# Altium PCB LCD_Disp.PcbDoc
Units mm, origin at the board's own origin, x right, y up, seen from the top; angles counter-clockwise.
Board outline 50 x 34 mm, 4 copper layers (TOP, GND, PWR, BTM), stack 1.618 mm thick; 17 components, 9 nets, 50 pads, 15 vias.
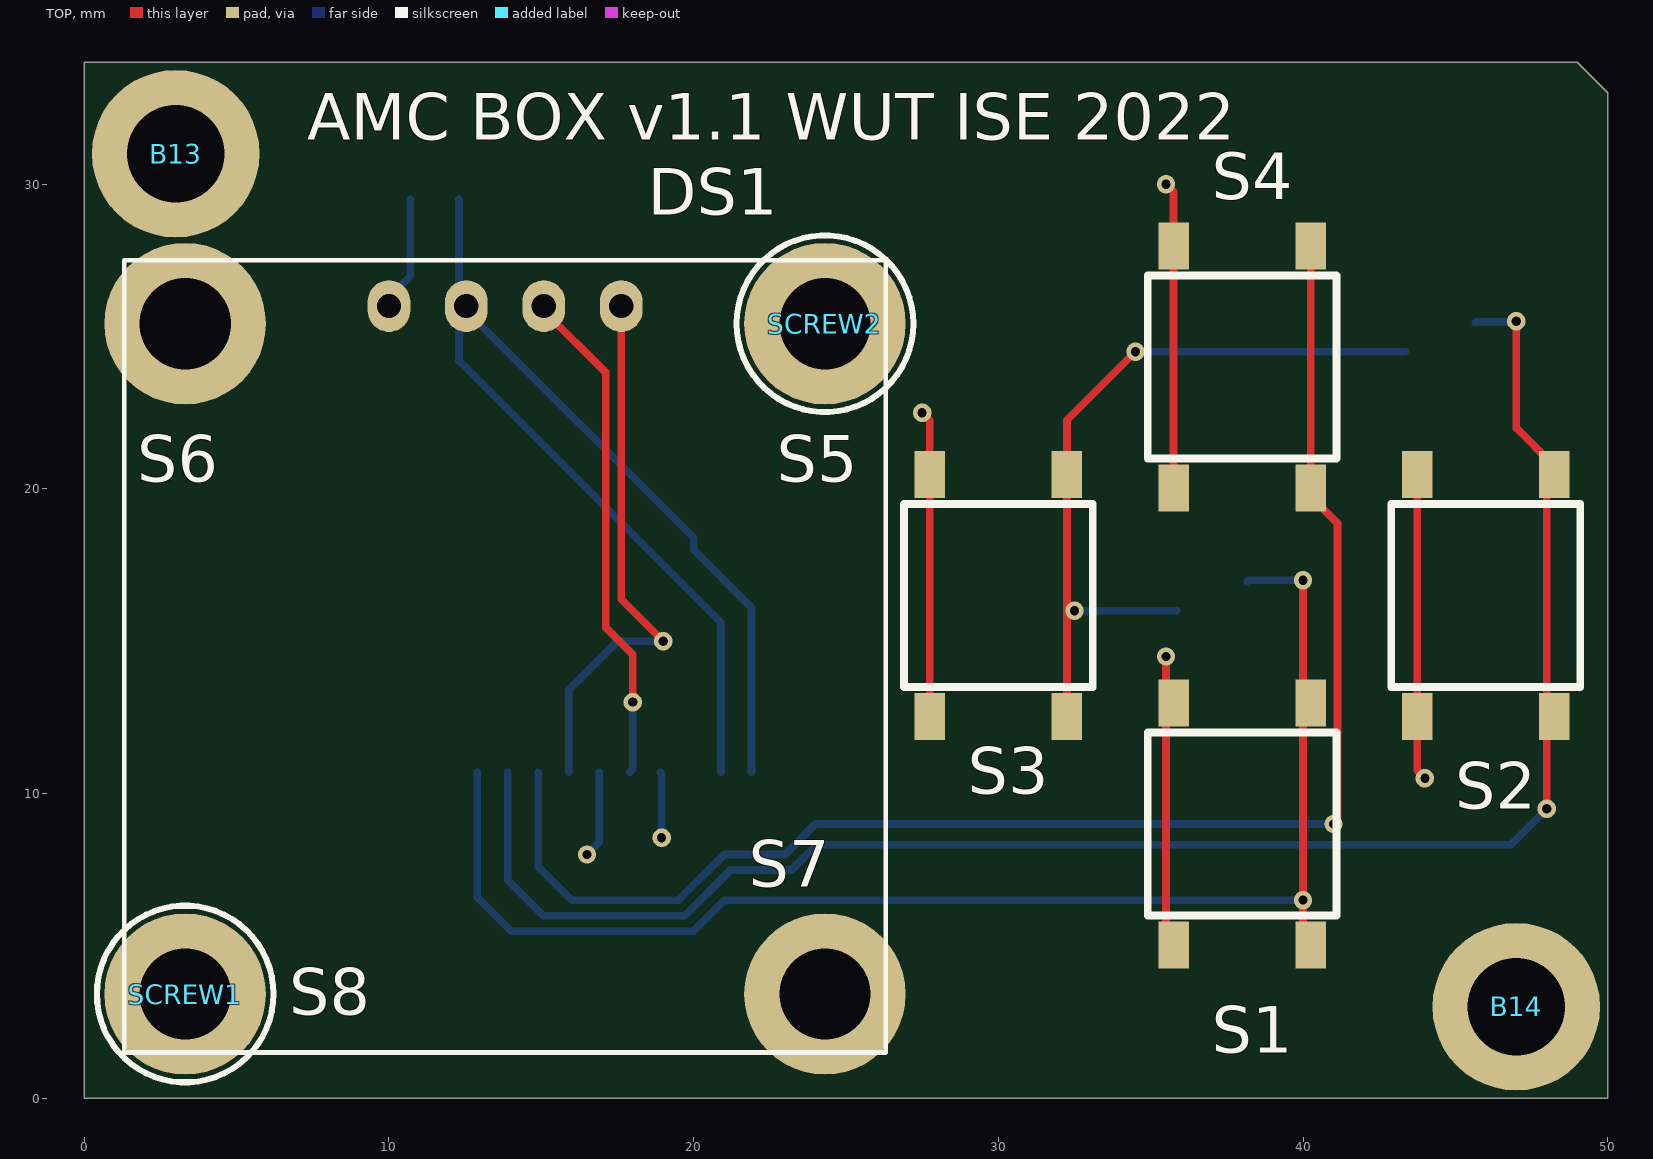
[diagram p0: TOP view]
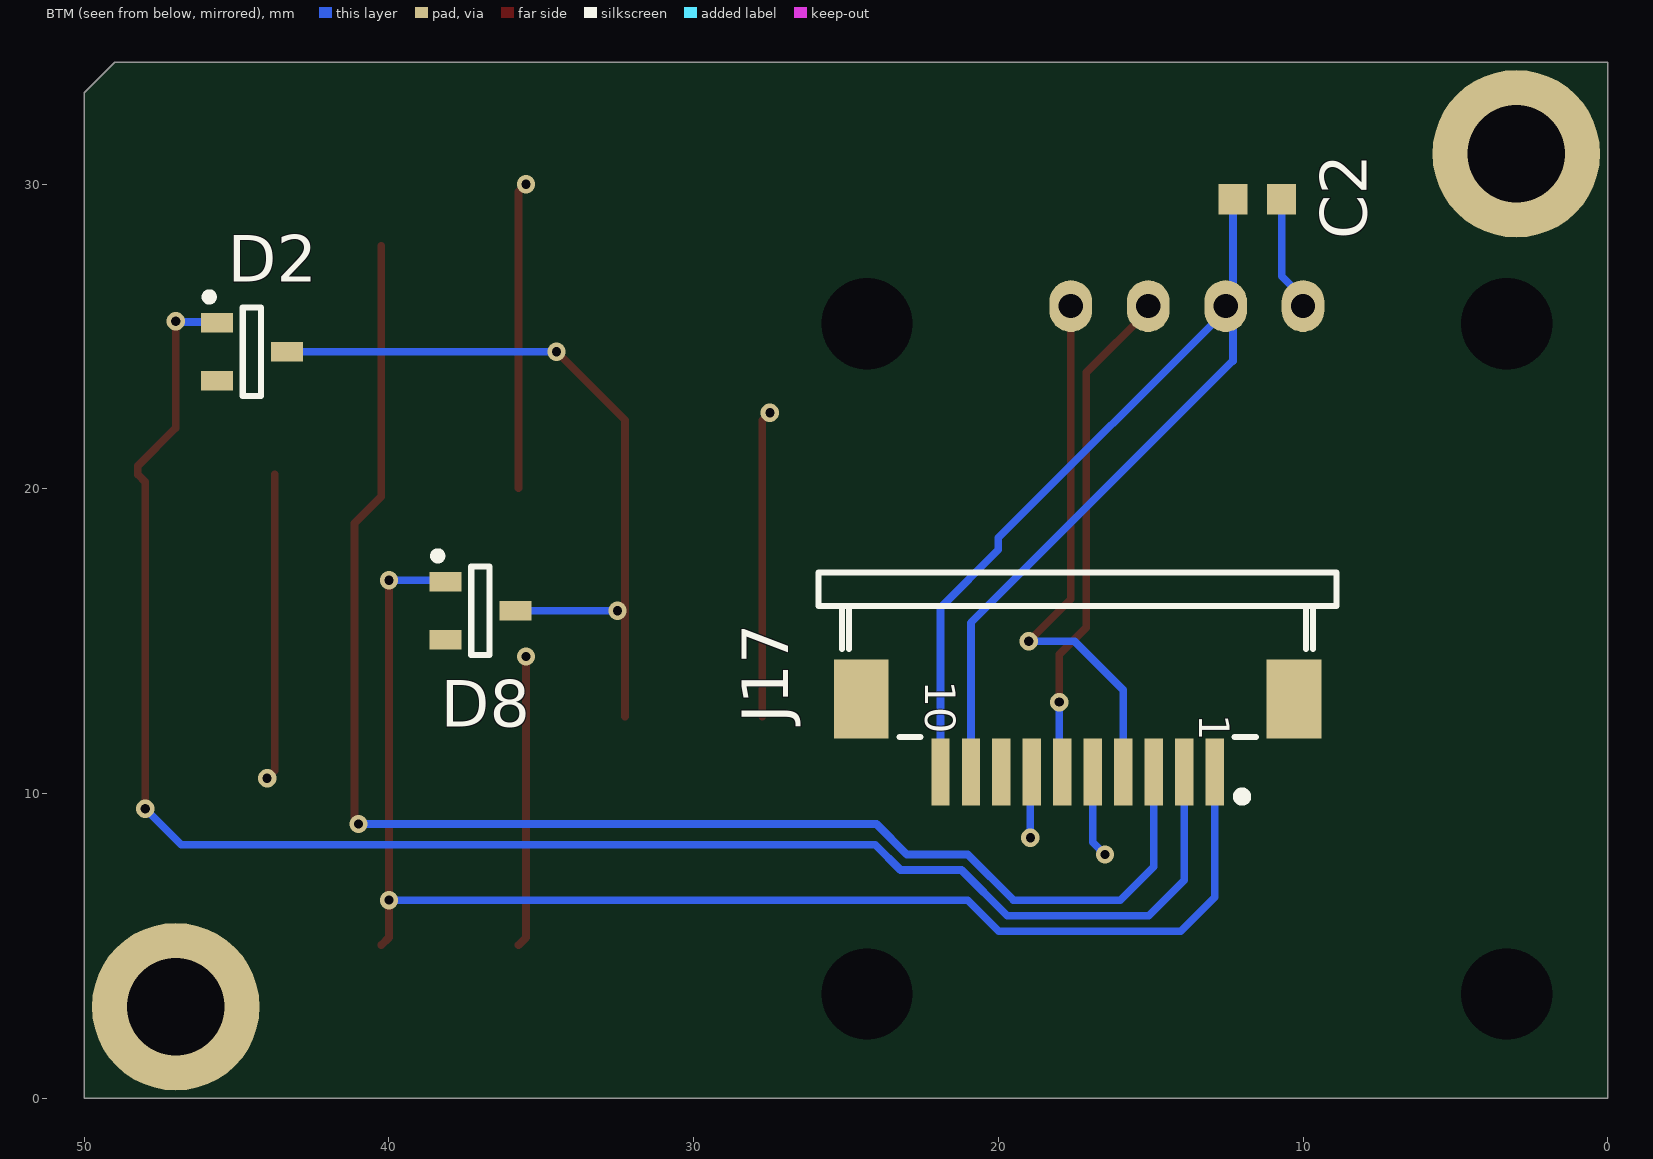
[diagram p1: BTM view, seen from below]
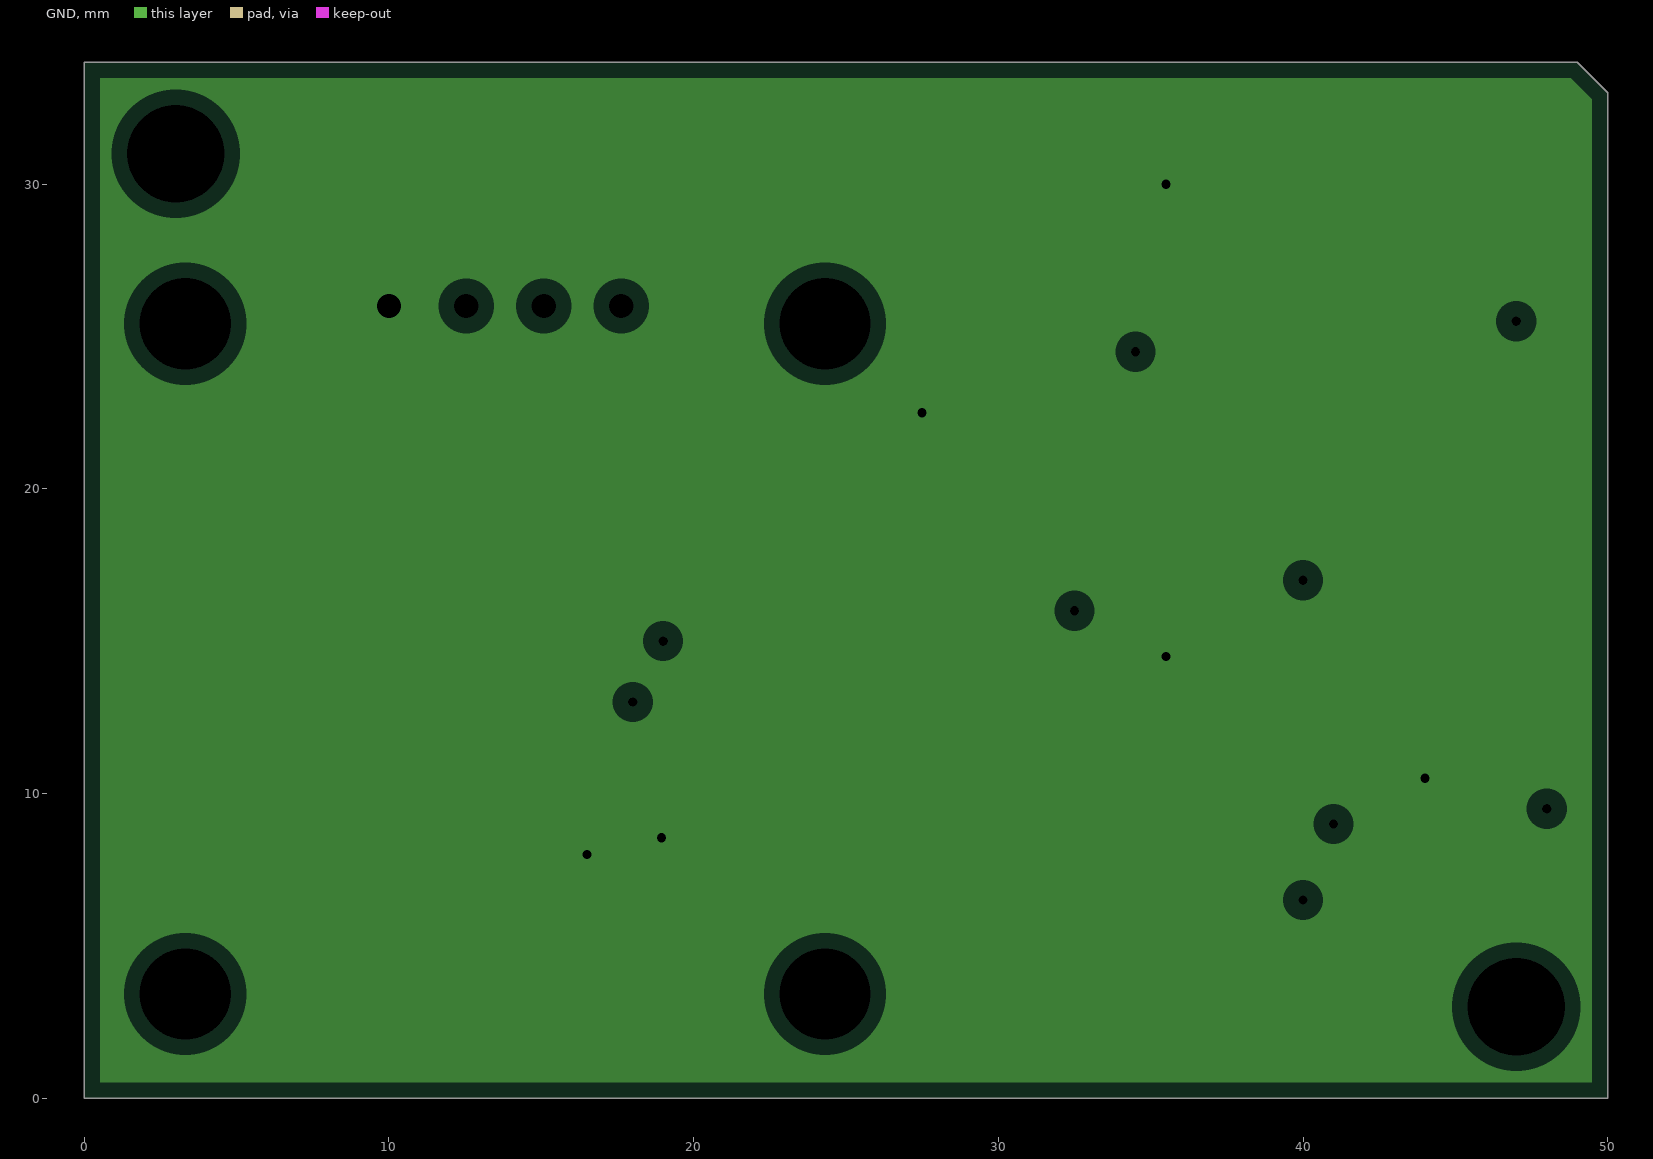
[diagram p2: GND, clearances drawn from the general rule]
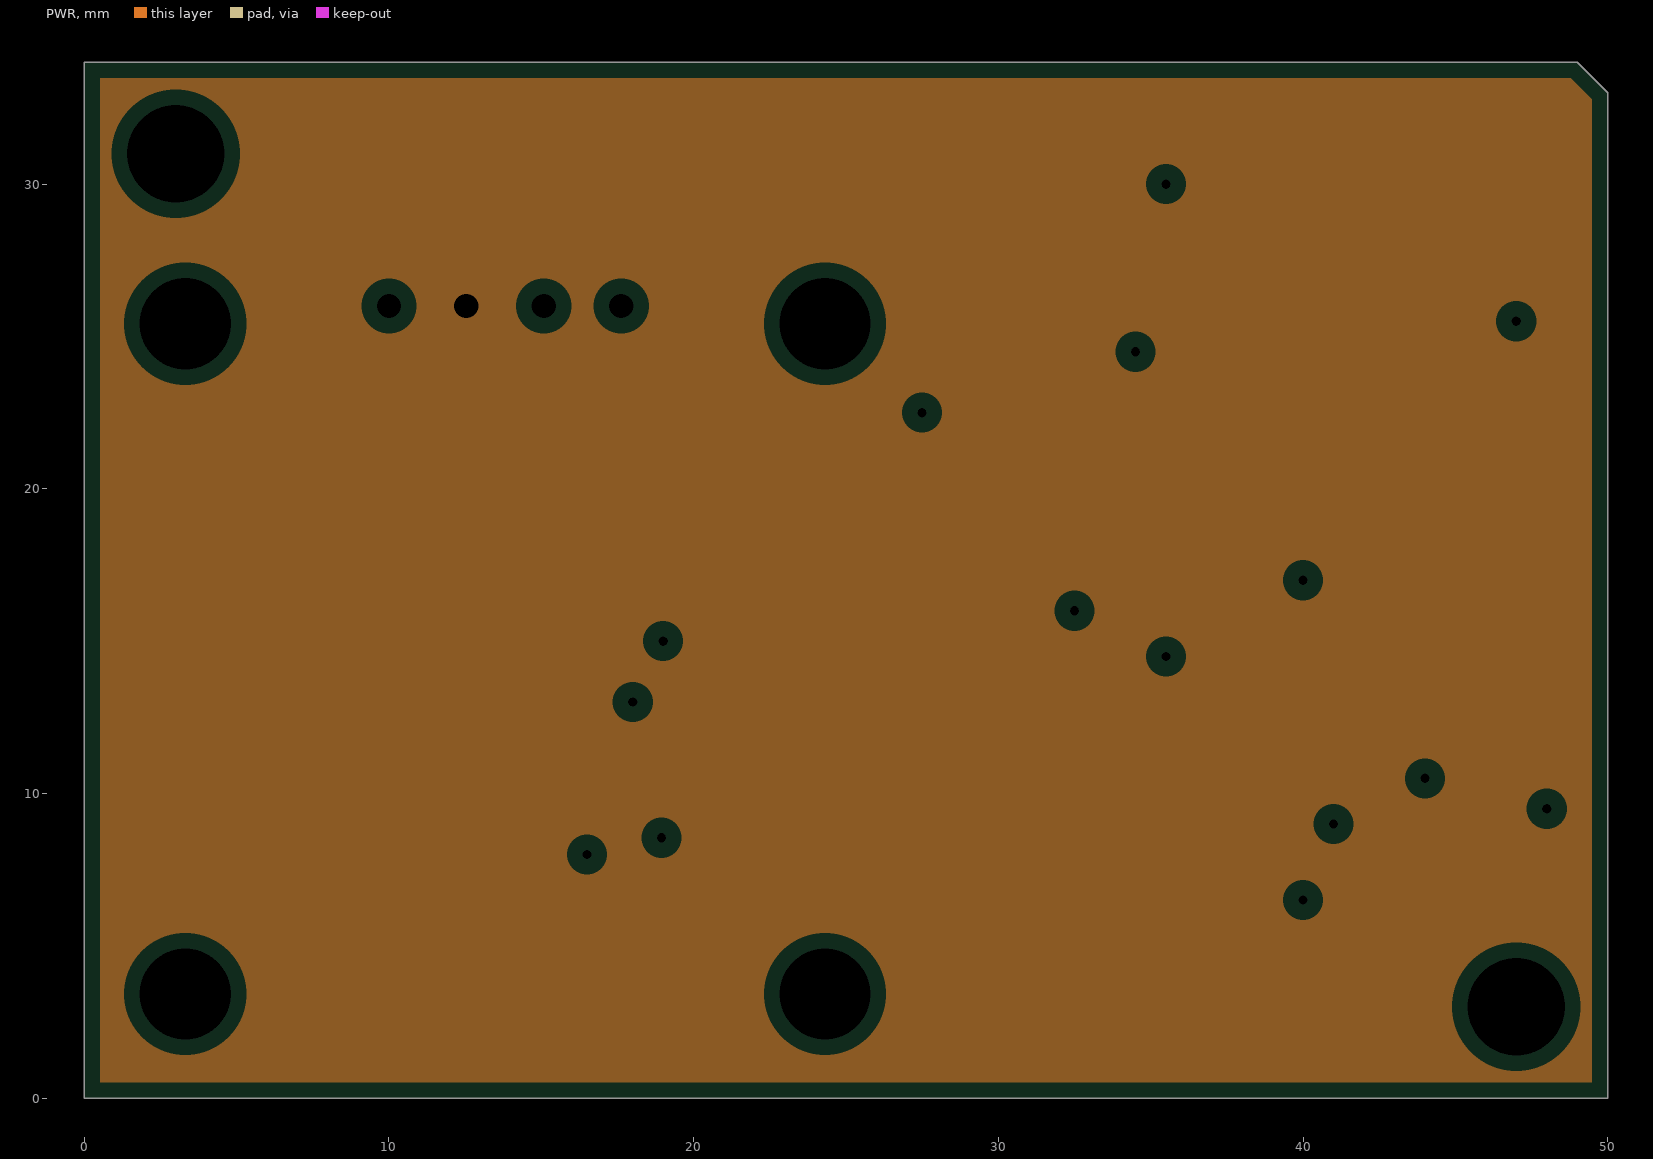
[diagram p3: PWR, clearances drawn from the general rule]
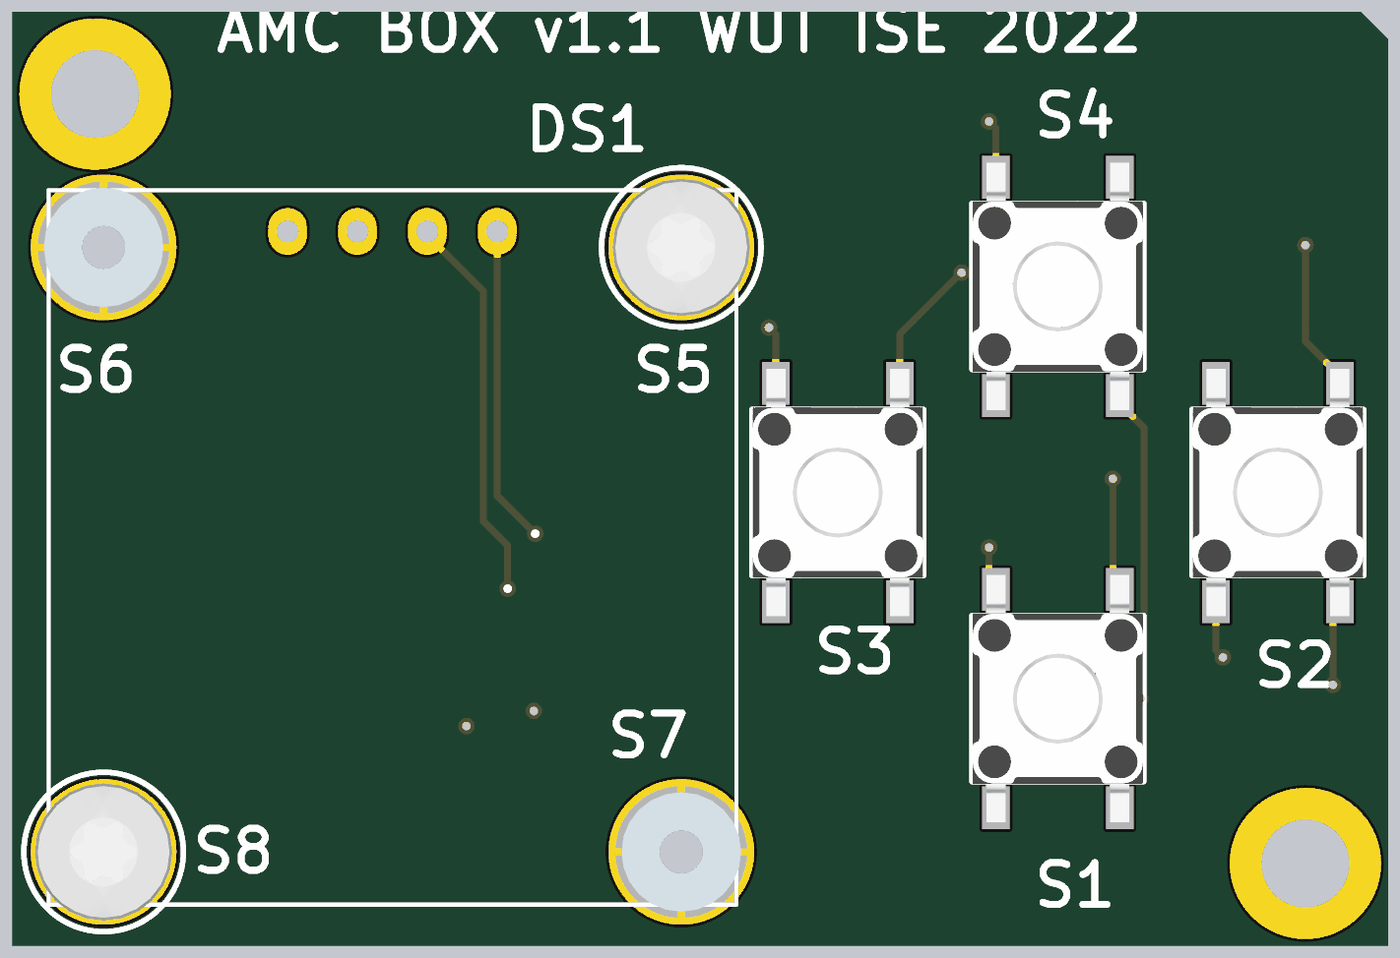
[diagram p4: 3D render of the assembled board from above, using the file's embedded part models]
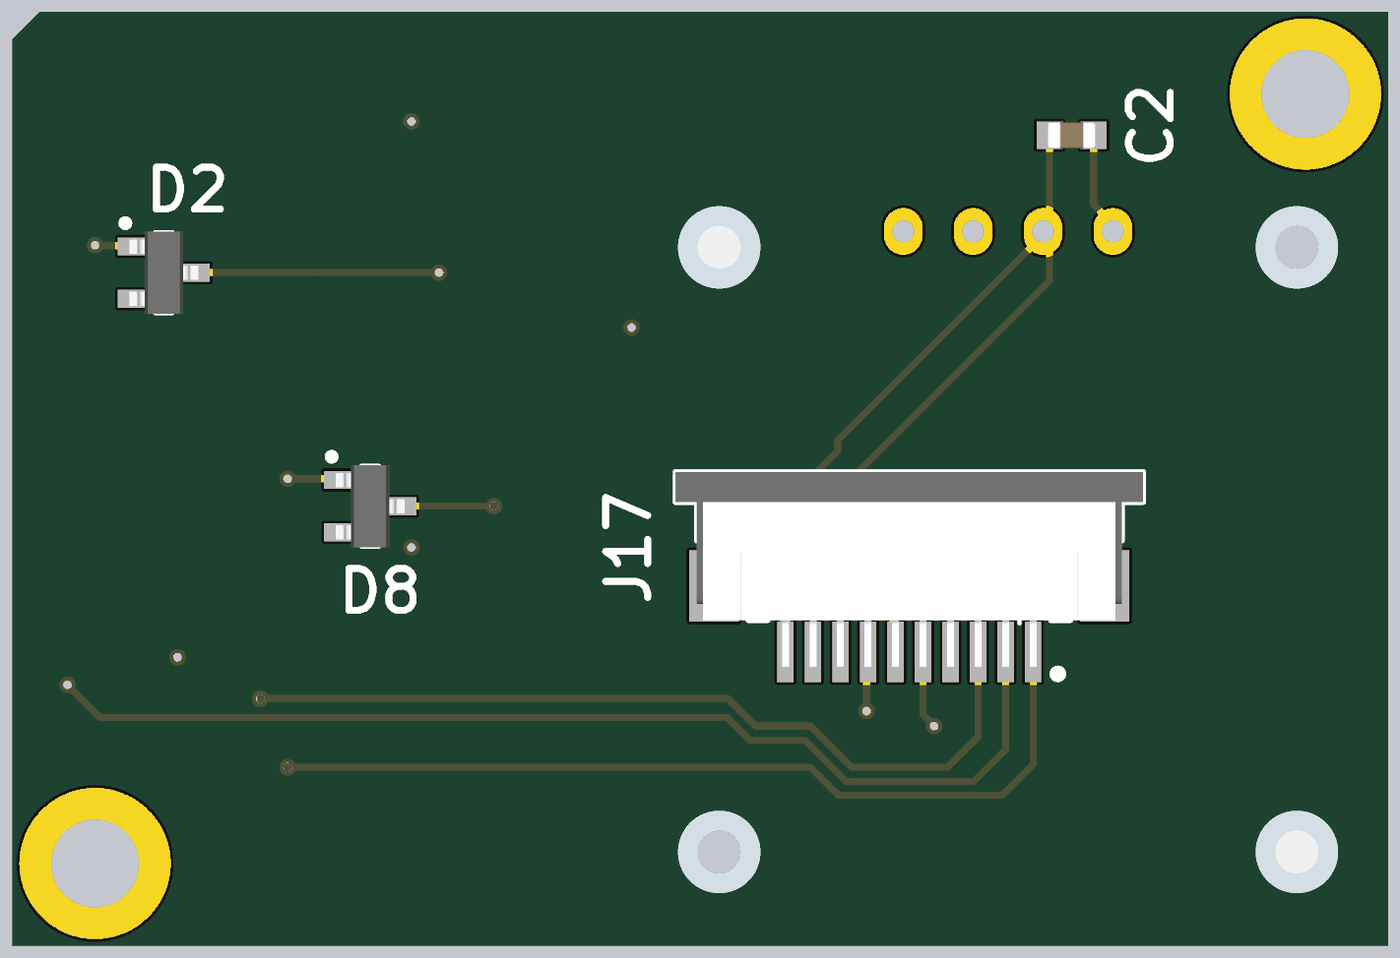
[diagram p5: 3D render of the assembled board from below, using the file's embedded part models]

## Layer stack, top to bottom
Top Solder: solder mask 0.012, Solder Resist, Dk 3.5
TOP: signal copper 0.053
Dielectric1: core 0.18, FR4 IT180-A / S1000-2 0.135mm 18u/18u, Dk 4.5
GND: plane copper 0.036, net GND
Dielectric2: prepreg 1.08, FR-4, Dk 4.5
PWR: plane copper 0.036, net P3V3
Dielectric3: core 0.18, FR4 IT180-A / S1000-2 0.135mm 18u/18u, Dk 4.5
BTM: signal copper 0.053
Bottom Solder: solder mask 0.012, Solder Resist, Dk 3.5

## Board outline
0,0 50,0 50,33 49,34 0,34

## Design rules (kind name [scope] priority, off if disabled: settings)
Clearance [All] p1: gap=0.15 ignorepadtopadclearanceinfootprint=FALSE
HoleSize [All] p1: absolutevalues=TRUE maxlimit=4 minlimit=0.2 maxpercent=80.000 minpercent=20.000
MinimumSolderMaskSliver [All] p1: minsoldermaskwidth=0.05
PlaneClearance [All] p1: clearance=0.508
PlaneConnect [All] p1: planeconnectstyle=Relief reliefexpansion=0.508 reliefentries=4 reliefconductorwidth=0.254 reliefairgap=0.254
PolygonConnect [All] p1: connectstyle=Relief reliefconductorwidth=0.254 reliefentries=4 polygonreliefangle="90 Angle" airgapwidth=0.254
RoomDefinition LCD_DIsp [InComponentClass('LCD_DIsp')] p1 off: confinementstyle=ConfineIn formatcopy=TRUE lockcomponents=FALSE outline 4,0 37,0 37,7 4,7
RoutingVias [All] p1: holewidth=0.711 width=1.27 viastyle="Through Hole" minholewidth=0.711 minwidth=1.27 maxholewidth=0.711 maxwidth=1.27 useviatemplates=TRUE viatemplateguid#1={927FE58B-87CC-4F0B-9204-EF5B2F46FF37} viatemplatename#1=v60h30m0mx0
SilkToSilkClearance [All] p1: silktosilkclearance=0.05
SilkToSolderMaskClearance [IsPad] p1: minsilkscreentomaskgap=0.05 clearancetoexposedcopper=TRUE
SolderMaskExpansion [All] p1: expansion=0.102 istentingtop=FALSE
Width [All] p1: maxlimit=0.254 minlimit=0.254 preferedwidth=0.254
24 further rules are at their usual default settings.

## Components (designator, comment, footprint, x,y, rotation, side; value= is the part's Value field where it differs from the comment)
B13 "Plated Hole" MTG320_550 3,31 r0 top locked
B14 "Plated Hole" MTG320_550 47,3 r0 top locked
C2 "1uF" CAPC1608X87N 11.5,29.5 r0 bottom
D2 "BAT54" SOT95P240X130-3N 44.5,24.5 r180 bottom
D8 "BAT54" SOT95P240X130-3N 37,16 r180 bottom
DS1 "OSSD-128x64" OSSD-128X64 13.81,26 r0 top locked
J17 "FFC" "WURTH_686 110 144 22" 17.4,10.7 r0 bottom
S1 "430152095826" 4301X20958X6_6X6X9.5 38,9 r90 top
S2 "430152095826" 4301X20958X6_6X6X9.5 46,16.5 r90 top
S3 "430152095826" 4301X20958X6_6X6X9.5 30,16.5 r90 top
S4 "430152095826" 4301X20958X6_6X6X9.5 38,24 r90 top
S5 "9774015243" 9774015243 24.31,25.42 r0 top
S6 "9774015243" 9774015243 3.31,25.42 r0 top
S7 "9774015243" 9774015243 24.31,3.42 r0 top
S8 "9774015243" 9774015243 3.31,3.42 r0 top
SCREW1 "M2.5x4" BOSSARD_BN5687-3061587_v 3.31,3.42 r90 top
SCREW2 "M2.5x4" BOSSARD_BN5687-3061587_v 24.31,25.42 r90 top

## Footprints (in the part's own frame and the unit in brackets; to place one, negate y for a bottom-side part, rotate by r counter-clockwise, add the part's x,y. Pads: shape width x height; smd on the part's side, far side on the other; paste and mask are expansions set on the pad)
4301X20958X6_6X6X9.5 [mm] "6x6mm Tact Switch, SMD version"
  rect 1.55x1 smd: 1(-3.975,2.25) 2(-3.975,-2.25) 3(3.975,2.25) 4(3.975,-2.25)
  silkscreen extent -3,-3.1 3,3.1, body extent -4.5,-3.1 4.5,3.1, height 9.53
9774015243 [mm] "SMD Steel Spacer with internal Thread"
  round 5.3 smd paste-576.133: 1(0,0)
  round 0 hole 3 unplated: ""(0,0)
  body extent -2.17,-2.17 2.16,2.17, height 1.5
BOSSARD_BN5687-3061587_v [mm] "M2.5 L=4mm Hexalobular Socket Pan Head Screw, Fully Threaded - Stainless Steel A2"
  silkscreen extent -2.9,-2.9 2.9,2.9, body extent -2.5,-2.5 2.5,2.5, height 5.1
CAPC1608X87N [mm] "Chip Capacitor, Body 1.6x0.8mm IPC Medium Density"
  rect 0.95x1 smd: 1(-0.8,0) 2(0.8,0)
  body extent -0.87,-0.47 0.88,0.48, height 0.87
MTG320_550 [mm] "Plated Through Hole: Hole Dia.=3.2mm Pad Dia.=5.5mm"
  round 5.5 hole 3.2: 1(0,0)
OSSD-128X64 [mm]
  oval 1.4x1.7 hole 0.8: 1(-3.81,0) 2(-1.27,0) 3(1.27,0) 4(3.81,0)
  silkscreen extent -12.5,-24.5 12.5,1.5, body extent -12.5,-24.5 12.5,1.5, height 5.4
SOT95P240X130-3N [mm] "SOT23 3-Leads, Pitch 0.95mm - Body 1.3x2.9mm, IPC Medium Density"
  rect 1.05x0.65 smd: 1(-1.15,0.95) 2(-1.15,-0.95) 3(1.15,0)
  silkscreen extent -1.53,-1.45 0.3,1.92, body extent -1.25,-1.5 1.25,1.5, height 1.3
"WURTH_686 110 144 22" [mm] "10 Contacts, Pitch 1mm, SMT Connector, ZIF Horizontal Bottom Contact WR-FPC"
  rect 0.6x2.2 smd: 1(-4.5,0) 2(-3.5,0) 3(-2.5,0) 4(-1.5,0) 5(-0.5,0) 6(0.5,0) 7(1.5,0) 8(2.5,0) 9(3.5,0) 10(4.5,0)
  rect 1.8x2.6 smd: P1(-7.1,-2.4) P2(7.1,-2.4)
  silkscreen extent -8.5,-6.55 8.5,0.95, body extent -8.5,-6.55 8.5,0.55, height 3

## Part data
B13 B14: library part PLATED_HOLE3.2_PAD5.5, "Single Terminal Socket", Author="CERN DEM JMW", Component Type="Standard (No BOM)", ComponentHeight=0mm, CreateDate=01.10.2012, Family="Plated Hole", HelpURL=Undefined, LatestRevisionDate=01.10.2012, Mounted=No, PackageDescription="Plated Through Hole: Hole Dia.=3.2mm Pad Dia.=5.5mm", Part Description="Plated Through Hole: Hole Dia.=3.2mm Pad Dia.=5.5mm", Part Number=PLATED_HOLE3.2_PAD5.5, Pin Count=1, Sense=No, SMD=No, Socket=No, Status=None
C2: library part CC0603_1UF_16V_10%_X7R, "Non-polarised capacitor", Case=0603, Manufacturer=GENERIC, Manufacturer1 ComponentHeight=0.9mm, Manufacturer1 Example="YAGEO PHYCOMP", Manufacturer1 Part Number=223878615663, Manufacturer Part Number=CC0603_1uF_16V_10%_X7R, Tolerance=±10%, Voltage=16V, Author="CERN DEM JLC", Component Type=Standard, CreateDate=03.12.2007, HelpURL=\\cern.ch\dfs\Applications\Altium\Datasheets\CC0603_X7R_PHYCOMP.pdf, LatestRevisionDate=17.04.2015, Mounted=Yes, Part Description="SMD Multilayer Chip Ceramic Capacitor", Part Number=CC0603_1UF_16V_10%_X7R, Pin Count=2, Sense=No, SMD=Yes, Socket=No, Status=None, TC=X7R
D2 D8: "Diode Schottky  Anode Pin 1 Cathode Pin 3 (Pas de pin 2)", Case=SOT23-3, Manufacturer="FAIRCHILD SEMICONDUCTOR", Power=200mA, Voltage=30V, Author="CERN DEM JLC", Component Type=Standard, ComponentHeight=1.30mm, CreateDate=2009-09-17, Device=BAT54, HelpURL=\\cern.ch\dfs\Applications\Altium\Datasheets\BAT54.pdf, LatestRevisionDate=2010-05-27, Manufacturer Part Number=BAT54, Mounted=Yes, PackageDescription="SOT23 3-Leads, Pitch 0.95mm - Body 1.3x2.9mm, IPC Medium Density", Part Description="Single Small Signal Schottky Diode", Part Number=BAT54, Pin Count=3, SMD=Yes, Socket=No, Table=Diodes
DS1: library part OLED_OSSD-128x64, "128x64 0.96\" OLED display", Color=Blue, Manufacturer=Generic, Author=GK, Bonding=No, Component Type=Standard, ComponentHeight=2.8mm, CreateDate=24.08.2011, Device=OSSD-128x64, HelpURL=\\cern.ch\dfs\Applications\Altium\Datasheets\DS_EA_DOGXL160B-7.pdf, LatestRevisionDate=27.04.2011, Manufacturer Part Number=OSSD-128x64, Mounted=Yes, PackageDescription="128x64 1.3\" OLED display", Part Description="128x64 1.3\" OLED display", Part Number=OSSD-128x64, Pin Count=4, PressFit=No, Sense=No, SMD=No, Socket=No
J17: library part "WURTH_686 110 144 22", "Connector 10 Female", Manufacturer="WURTH ELEKTRONIK", Manufacturer Part Number="686 110 144 22", Author="CERN DEM JMW", Component Type=Standard, ComponentHeight=3.15mm, CreateDate=06.08.2015, Family=FFC, HelpURL="\\cern.ch\dfs\Applications\Altium\Datasheets\WURTH_686 110 144 22.pdf", LatestRevisionDate=06.08.2015, Mounted=Yes, Part Description="10 Contacts, Pitch 1mm, SMT Connector, ZIF Horizontal Bottom Contact WR-FPC", Part Number="WURTH_686 110 144 22", Pin Count=10, PressFit=No, Sense=No, SMD=Yes, Socket=No, Status=None
S1 S2 S3 S4: "WS-TASV 6x6mm Tact Switch, SMD version", ComponentLink1Description=Manufacturer, ComponentLink1URL=http://www.we-online.de, ComponentLink2Description=Datasheet, ComponentLink2URL=http://katalog.we-online.de/em/datasheet/4301x2xxx8x6.pdf, Life Cycle="200000 cycles", Operation Force=260g, Part Number=430152095826, Published Date="June 2017", Publisher="Wurth Elektronik", Size="6x6x9.5 mm"
S5 S6 S7 S8: library part "WA-SMSI,  9774015243", "WA-SMSI SMD Steel Spacer with internal Thread", Manufacturer="Wurth Elektronik", ComponentLink1Description=Manufacturer, ComponentLink1URL=http://www.we-online.de, ComponentLink2Description=Datasheet, ComponentLink2URL=http://katalog.we-online.de/em/datasheet/9774015243.pdf, Created by="Baojun Chen", Created Date=20.Oct.2015, partNo=9774015243
SCREW1 SCREW2: library part BOSSARD_BN5687-3061587_v, "Screw", Manufacturer=BOSSARD, Manufacturer Part Number="BN5687 Art.3061587", Author="CERN DEM JLC", Component Type=Mechanical, ComponentHeight=5mm, CreateDate=22.08.2013, HelpURL=\\cern.ch\dfs\Applications\Altium\Datasheets\BOSSARD_BN5687-3061587.pdf, LatestRevisionDate=22.08.2013, Mounted=Yes, PackageDescription="M2.5 L=4mm Hexalobular Socket Pan Head Screw, Fully Threaded - Stainless Steel A2", Part Description="M2.5 L=4mm Hexalobular Socket Pan Head Screw, Fully Threaded, Stainless Steel A2", Part Number=BOSSARD_BN5687-3061587_v, Pin Count=0, PressFit=No, Sense=No, SMD=No, Socket=No, Status=None

## Via types
v1: diameter 0.6, hole 0.3, TOP to BTM, tented both sides, 15 vias

## Nets (pads, with @x,y where several pads share a name; then routed paths per layer and width w, separated by ;. In a path a pad name is that pad's centre, name@x,y a point inside that pad or via, vN(x,y) a via of type N, cw(c..) or ccw(c..) an arc to the next point about the centre after c; other vN are vias at no path point)
GND: C2.1 DS1.1 J17.5 J17.7 S1.1 S1.3 S2.1 S2.3 S3.1 S3.3 S4.1 S4.3 | length 48.6
  TOP w0.254: v1(27.5,22.5) 27.75,22.25 S3.3 S3.1 ; v1(35.5,14.5) 35.5,5.275 S1.1 ; v1(35.5,30) 35.75,29.75 S4.3 S4.1 ; S2.3 S2.1 43.75,10.75 v1(44,10.5)
  BTM w0.254: DS1.1 10,26.279 10.7,26.979 C2.1 ; v1(16.5,8) 16.9,8.4 J17.5 ; J17.7 18.95,10.65 v1(18.95,8.55)
NetD2_3: D2.3 D8.3 S3.2 S3.4 | length 25.1
  TOP w0.254: S3.2 S3.4 32.25,22.25 v1(34.5,24.5)
  BTM w0.254: v1(32.5,16) D8.3 ; v1(34.5,24.5) D2.3
P3V3: C2.2 DS1.2 J17.9 J17.10 | length 41.5
  BTM w0.254: C2.2 12.3,24.2 20.9,15.6 J17.9 ; DS1.2 12.54,25.85 20,18.39 20,18 21.9,16.1 J17.10
RST: J17.8
SCL: DS1.3 J17.6 | length 16.6
  TOP w0.254: DS1.3 15.08,25.85 17.112,23.818 17.112,15.451 18,14.563 v1(18,13)
  BTM w0.254: J17.6 18,10.8 v1(18,13)
SDA: DS1.4 J17.4 | length 18
  TOP w0.254: DS1.4 17.62,16.38 v1(19,15)
  BTM w0.254: J17.4 15.9,13.4 17.5,15 v1(19,15)
SW0: D8.1 J17.1 S1.2 S1.4 | length 46
  TOP w0.254: v1(40,17) v1(40,6.5) 40,5.275 S1.2
  BTM w0.254: J17.1 12.9,6.6 14.016,5.484 19.984,5.484 21,6.5 v1(40,6.5) ; D8.1 38.2,17 v1(40,17)
SW1: D2.1 J17.2 S2.2 S2.4 | length 57.6
  TOP w0.254: v1(47,25.5) 47,22 48.25,20.75 S2.4 48,20.225 v1(48,9.5)
  BTM w0.254: J17.2 13.9,7.157 15.065,5.992 19.71,5.992 21.21,7.492 23.21,7.492 24.037,8.319 46.819,8.319 v1(48,9.5) ; D2.1 45.675,25.475 46.975,25.475 v1(47,25.5)
SW2: J17.3 S4.2 S4.4 | length 50.1
  TOP w0.254: S4.4 S4.2 40.25,19.75 41.131,18.869 41.131,9.225 41,9.094 v1(41,9)
  BTM w0.254: J17.3 14.9,7.6 16,6.5 19.5,6.5 21,8 23,8 24,9 v1(41,9)
pads on no net: B13.1 B14.1 D2.2 D8.2 J17.P1 J17.P2 S5. S5.1 S6. S6.1 S7. S7.1 S8. S8.1

## Polygon pours and split planes (outlines as drawn)
GND on GND (split plane): 49.49,32.789 49.49,0.51 0.51,0.51 0.51,33.49 48.789,33.49
P3V3 on PWR (split plane): 49.49,32.789 49.49,0.51 0.51,0.51 0.51,33.49 48.789,33.49

## Silkscreen, mask and mechanical layers (free items; w line width, h text height)
Top Overlay:
  text "AMC BOX v1.1 WUT ISE 2022" at 7.319,31.467 h1.52
Mechanical 1:
  the board outline again, w0.203

## Text inside footprints (layer, text, board x,y; h text height)
J17: Bottom Overlay "10" at 22.4,13.7 h1 r90; Bottom Overlay "1" at 13.4,12.6 h1 r90